# Altium PCB SPWM_PS_V1.00.PCBDOC
Units mm, origin at the board's own origin, x right, y up, seen from the top; angles counter-clockwise.
Board outline 121.4 x 86.4 mm, 2 copper layers (Top Layer, Bottom Layer); 89 components, 57 nets, 294 pads, 45 vias.
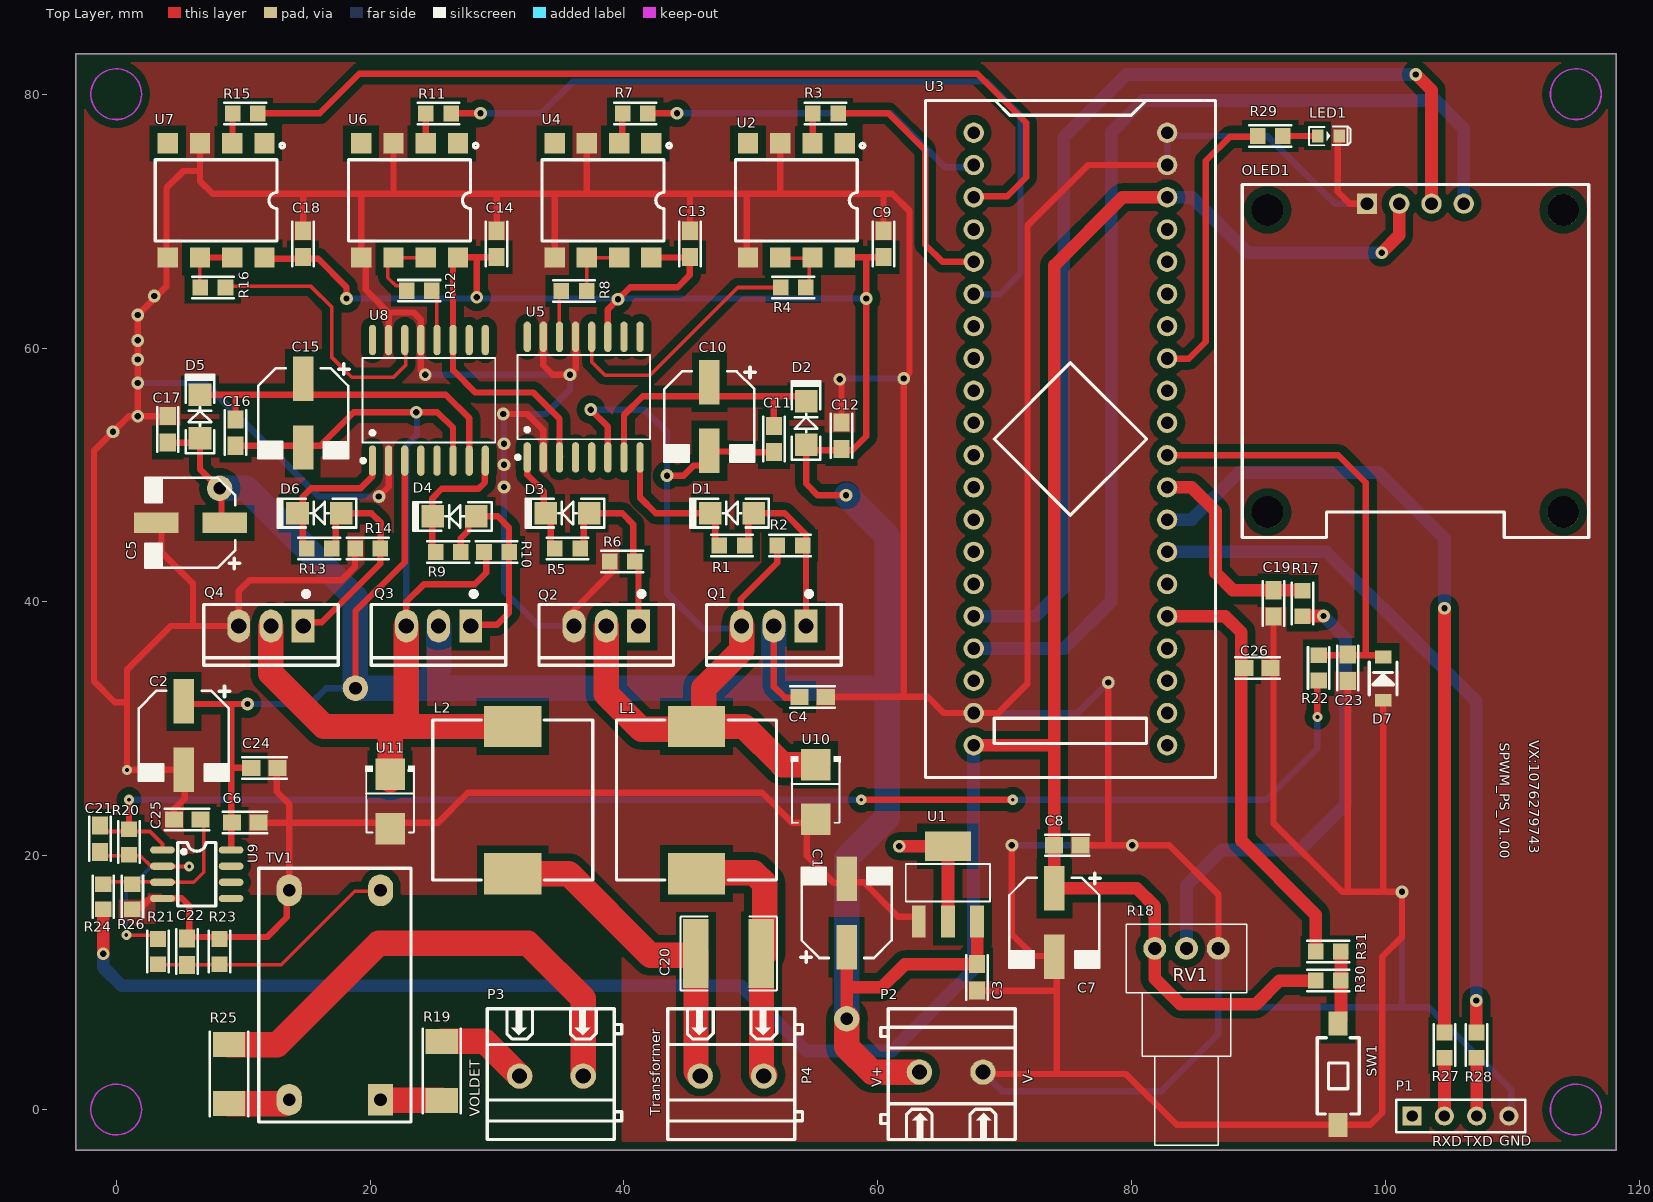
[diagram p0: Top Layer view]
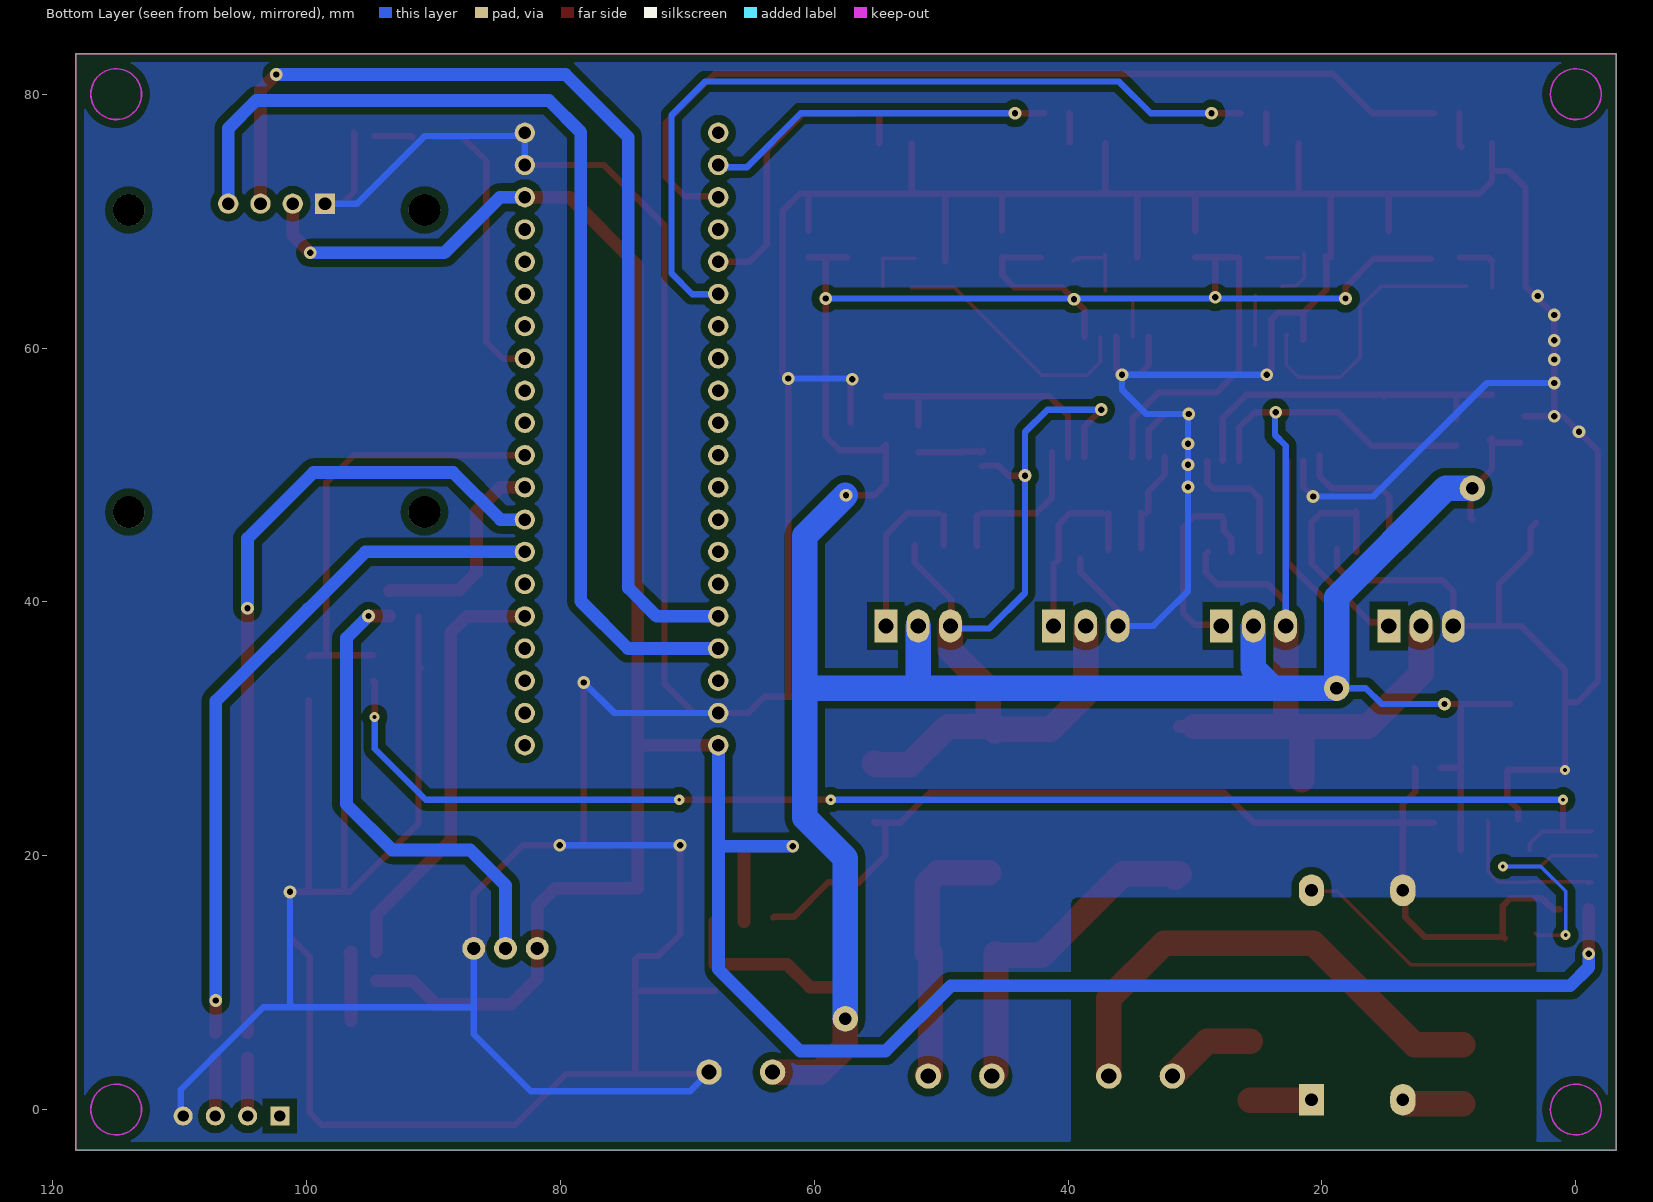
[diagram p1: Bottom Layer view, seen from below]

## Layer stack, top to bottom
Top Layer: signal copper 0.0356
Dielectric: dielectric 0.32, FR-4, Dk 4.8
Bottom Layer: signal copper 0.0356

## Board outline
-3.2,-3.2 -3.2,83.2 118.2,83.2 118.2,-3.2

## Design rules (kind name [scope] priority, off if disabled: settings)
Clearance [All] p1: gap=0.6
ComponentClearance [All] p1: gap=0.254 collisioncheckmode=3 verticalgap=0.254
HoleSize [All] p1: absolutevalues=TRUE maxlimit=3 minlimit=0.025 maxpercent=80.000 minpercent=20.000
PlaneConnect [All] p1: planeconnectstyle=Direct reliefexpansion=0.508 reliefentries=4 reliefconductorwidth=0.254 reliefairgap=0.254
PolygonConnect [All] p1: connectstyle=Direct reliefconductorwidth=0.254 reliefentries=4 polygonreliefangle="90 Angle"
RoutingVias [All] p1: holewidth=0.711 width=1.27 viastyle="Through Hole" minholewidth=0.5 minwidth=1 maxholewidth=0.711 maxwidth=1.27
SolderMaskExpansion [All] p1: expansion=0.102
TestPointUsage [All] p1: valid=0 allowmultiple=FALSE
Testpoint [All] p1: side=3 testpointundercomponent=TRUE minsize=1.016 maxsize=2.54 preferedsize=1.524 minholesize=0 maxholesize=1.016 preferedholesize=0.813 testpointgrid=0.025 style=297 order=0-112345678
Width [All] p1: maxlimit=2 minlimit=0.254 preferedwidth=0.3
16 further rules are at their usual default settings.

## Components (designator, comment, footprint, x,y, rotation, side; value= is the part's Value field where it differs from the comment)
C1 "100uF/35V" PCD-10135-MB-36_100UF/35V 57.55,15.494 r90 top
C2 "100uF/35V" PCD-10135-MB-36_100UF/35V 5.334,29.464 r270 top
C3 "100nF" PC7-*****-KN-0A_0805 67.818,10.414 r270 top
C4 "100nF" PC7-*****-KN-0A_0805 54.864,32.512 r0 top
C5 "100uF/35V" PCD-10135-MB-36_100UF/35V 5.842,46.228 r180 top
C6 "100nF" PC7-*****-KN-0A_0805 10.16,22.606 r0 top
C7 "100uF/35V" PCD-10135-MB-36_100UF/35V 73.914,14.732 r270 top
C8 "100nF" PC7-*****-KN-0A_0805 74.93,20.828 r0 top
C9 "PC7_1206" PC7-*****-KN-0A_0805 60.452,68.198 r90 top
C10 "10uF/35V" PCD-10050-MA-26_10UF/50V 46.736,54.61 r270 top
C11 "100nF" PC7-*****-KN-0A_0805 51.816,52.832 r270 top
C12 "100nF" PC7-*****-KN-0A_0805 57.15,53.086 r90 top
C13 "PC7_1206" PC7-*****-KN-0A_0805 45.212,68.198 r90 top
C14 "100nF" PC7-*****-KN-0A_0805 29.972,68.198 r90 top
C15 "10uF/35V" PCD-10050-MA-26_10UF/50V 14.732,54.864 r270 top
C16 "100nF" PC7-*****-KN-0A_0805 9.398,53.34 r270 top
C17 "100nF" PC7-*****-KN-0A_0805 4.064,53.594 r90 top
C18 "100nF" PC7-*****-KN-0A_0805 14.732,68.198 r90 top
C19 "100nF" PC7-*****-KN-0A_0805 91.186,39.878 r90 top
C20 "47uF" C2220 48.26,12.296 r0 top
C21 "101" PC7-*****-KN-0A_0805 -1.27,21.336 r270 top
C22 "101" PC7-*****-KN-0A_0805 5.588,12.446 r270 top
C23 "102" PC7-*****-KN-0A_0805 97.028,34.798 r270 top
C24 "104" PC7-*****-KN-0A_0805 11.684,26.924 r0 top
C25 "104" PC7-*****-KN-0A_0805 5.588,22.86 r0 top
C26 "100nF" PC7-*****-KN-0A_0805 89.916,34.798 r180 top
D1 "1N4148" PDD-00020-30-2A_RLS4148NTE-11-K 48.514,46.99 r180 top
D2 "1N4007" PDD-00020-30-2A_RLS4148NTE-11-K 54.356,54.102 r90 top
D3 "1N4148" PDD-00020-30-2A_RLS4148NTE-11-K 35.56,46.99 r180 top
D4 "1N4148" PDD-00020-30-2A_RLS4148NTE-11-K 26.67,46.736 r180 top
D5 "1N4007" PDD-00020-30-2A_RLS4148NTE-11-K 6.604,54.61 r90 top
D6 "1N4148" PDD-00020-30-2A_RLS4148NTE-11-K 16.002,46.99 r180 top
D7 "PTVS3V3S1UR" SOD123 99.822,32.258 r90 top
L1 "47uH" IND-SMD_L13.8-W12.6_H6.5 45.72,24.384 r270 top
L2 "47uH" IND-SMD_L13.8-W12.6_H6.5 31.242,24.384 r270 top
LED1 "LED-0603_R" LED0603_RED 95.504,76.708 r0 top
OLED1 "UN-2864KMBEG01" OLED-TH_4P-P2.54-L27.8-W27.3 102.362,71.374 r0 top
P1 "Header 4" HDR1X4 102.108,-0.508 r0 top
P2 "Header 2" CONN-TH_2P-P5.00_WJ128V-5.0-2P 65.786,2.952 r0 top
P3 "Header 2" CONN-TH_2P-P5.00_WJ128V-5.0-2P 34.29,2.641 r180 top
P4 "Header 2" CONN-TH_2P-P5.00_WJ128V-5.0-2P 48.514,2.641 r180 top
Q1 "IRFZ44NPBF" TO-220-3_L10.0-W4.5-P2.54-L 51.816,38.1 r180 top
Q2 "IRFZ44NPBF" TO-220-3_L10.0-W4.5-P2.54-L 38.608,38.1 r180 top
Q3 "IRFZ44NPBF" TO-220-3_L10.0-W4.5-P2.54-L 25.4,38.1 r180 top
Q4 "IRFZ44NPBF" TO-220-3_L10.0-W4.5-P2.54-L 12.192,38.1 r180 top
R1 "51R" PRC-*****-1M-0A_0805 48.514,44.45 r0 top
R2 "103" PRC-*****-1M-0A_0805 53.086,44.45 r0 top
R3 "220R" PRC-*****-1M-0A_0805 55.88,78.486 r180 top
R4 "100R" PRC-*****-1M-0A_0805 53.34,64.77 r180 top
R5 "51R" PRC-*****-1M-0A_0805 35.56,44.196 r0 top
R6 "103" PRC-*****-1M-0A_0805 39.878,43.18 r0 top
R7 "220R" PRC-*****-1M-0A_0805 40.894,78.486 r180 top
R8 "100R" PRC-*****-1M-0A_0805 36.068,64.5 r180 top
R9 "51R" PRC-*****-1M-0A_0805 26.162,43.942 r0 top
R10 "103" PRC-*****-1M-0A_0805 29.972,43.942 r0 top
R11 "220R" PRC-*****-1M-0A_0805 25.4,78.486 r180 top
R12 "100R" PRC-*****-1M-0A_0805 23.876,64.516 r0 top
R13 "51R" PRC-*****-1M-0A_0805 16.002,44.196 r0 top
R14 "103" PRC-*****-1M-0A_0805 19.812,44.196 r0 top
R15 "220R" PRC-*****-1M-0A_0805 10.16,78.486 r180 top
R16 "100R" PRC-*****-1M-0A_0805 7.62,64.77 r0 top
R17 "1K" PRC-*****-1M-0A_0805 93.472,39.878 r270 top
R18 "10K" RES-ADJ-TH_RK09Y11L0001 84.328,12.7 r0 top
R19 "150K/2010" PRC-*****-CM-0A_2010 25.654,3.048 r90 top
R20 "10K" PRM-*****-1N-0A_0805 1.016,21.082 r270 top
R21 "5.1K" PRM-*****-1N-0A_0805 3.302,12.446 r270 top
R22 "100R" PRM-*****-1N-0A_0805 94.742,34.798 r270 top
R23 "200R" PRM-*****-1N-0A_0805 8.128,12.446 r270 top
R24 "10K" PRM-*****-1N-0A_0805 -1.016,16.764 r90 top
R25 "150K/2010" PRC-*****-CM-0A_2010 8.89,2.794 r270 top
R26 "2.0K" PRM-*****-1N-0A_0805 1.27,16.764 r270 top
R27 "1K" PRC-*****-1M-0A_0805 104.648,5.08 r270 top
R28 "1K" PRC-*****-1M-0A_0805 107.188,5.08 r270 top
R29 "1K" PRC-*****-1M-0A_0805 90.932,76.708 r0 top
R30 "1K" PRC-*****-1M-0A_0805 95.504,10.16 r180 top
R31 "1K" PRC-*****-1M-0A_0805 95.504,12.446 r180 top
SW1 "TS-1101-C-W" SW-SMD_L6.0-W3.3-LS8.0 96.266,2.794 r90 top
TV1 "Header 4" TV0815-1 20.828,17.272 r180 top
U1 "#NAME?" SOT-223-3_L6.5-W3.4-P2.30-LS7.0-BR 65.532,17.78 r270 top
U2 "TLP250H(TP1,F)" SMD-8_L9.6-W6.4-P2.54-LS9.6-BL 53.594,71.628 r180 top
U3 "LCKFB-DKX-STM32F103C8T6" CONN-TH_L53.3-W22.9_STM32F103C8T6-CARD 75.184,52.832 r270 top locked
U4 "TLP250H(TP1,F)" SMD-8_L9.6-W6.4-P2.54-LS9.6-BL 38.354,71.628 r180 top
U5 "IR2110STRPBF" SOIC-16_L10.3-W7.5-P1.27-LS10.3-BL 36.83,56.134 r0 top
U6 "TLP250H(TP1,F)" SMD-8_L9.6-W6.4-P2.54-LS9.6-BL 23.114,71.628 r180 top
U7 "TLP250H(TP1,F)" SMD-8_L9.6-W6.4-P2.54-LS9.6-BL 7.874,71.628 r180 top
U8 "IR2110STRPBF" SOIC-16_L10.3-W7.5-P1.27-LS10.3-BL 24.638,55.88 r0 top
U9 "LM258" LM358-SOIC-8 6.35,18.542 r270 top
U10 "SMBJ24A" SMB_L4.3-W3.6-LS5.3-RD 55.118,25.028 r270 top
U11 "SMBJ24A" SMB_L4.3-W3.6-LS5.3-RD 21.59,24.266 r270 top

## Footprints (in the part's own frame and the unit in brackets; to place one, negate y for a bottom-side part, rotate by r counter-clockwise, add the part's x,y. Pads: shape width x height; smd on the part's side, far side on the other; paste and mask are expansions set on the pad)
C2220 [mm]
  rect 2.01x5.4 smd: 1(-2.58,0) 2(2.58,0)
  silkscreen extent -3.81,-2.93 3.81,2.93
CONN-TH_2P-P5.00_WJ128V-5.0-2P [mm]
  round 2 hole 1.2: 1(-2.504,0) 2(2.504,0)
  silkscreen extent -5.55,-5.4 5.05,5
CONN-TH_L53.3-W22.9_STM32F103C8T6-CARD [mm]
  round 1.6 hole 1: 1(-24.13,-7.62) 2(-21.59,-7.62) 3(-19.05,-7.62) 4(-16.51,-7.62) 5(-13.97,-7.62) 6(-11.43,-7.62) 7(-8.89,-7.62) 8(-6.35,-7.62) 9(-3.81,-7.62) 10(-1.27,-7.62) 11(1.27,-7.62) 12(3.81,-7.62) 13(6.35,-7.62) 14(8.89,-7.62) 15(11.43,-7.62) 16(13.97,-7.62) 17(16.51,-7.62) 18(19.05,-7.62) 19(21.59,-7.62) 20(24.13,-7.62) 21(24.13,7.62) 22(21.59,7.62) 23(19.05,7.62) 24(16.51,7.62) 25(13.97,7.62) 26(11.43,7.62) 27(8.89,7.62) 28(6.35,7.62) 29(3.81,7.62) 30(1.27,7.62) 31(-1.27,7.62) 32(-3.81,7.62) 33(-6.35,7.62) 34(-8.89,7.62) 35(-11.43,7.62) 36(-13.97,7.62) 37(-16.51,7.62) 38(-19.05,7.62) 39(-21.59,7.62) 40(-24.13,7.62)
  silkscreen extent -26.67,-11.43 26.67,11.43
HDR1X4 [mm] "Connector; Header; 4 Position"
  rect 1.5x1.5 hole 0.9: 1(0,0)
  round 1.5 hole 0.9: 2(2.54,0) 3(5.08,0) 4(7.62,0)
  silkscreen extent -1.27,-1.27 8.89,1.27
IND-SMD_L13.8-W12.6_H6.5 [mm]
  rect 3.25x4.5 smd: 1(-5.8,0) 2(5.8,0)
  silkscreen extent -6.3,-6.3 6.3,6.3
LED0603_RED [mm]
  rect 0.9x1 smd: 1(-0.85,0) 2(0.85,0)
  silkscreen extent -1.54,-0.73 1.75,0.73
LM358-SOIC-8 [mil]
  oval 22.38x76.78 smd: 1(-75,-106.5) 2(-25,-106.5) 3(25,-106.5) 4(75,-106.5) 5(75,106.5) 6(25,106.5) 7(-25,106.5) 8(-75,106.5)
  silkscreen extent -98,-59 98,59
OLED-TH_4P-P2.54-L27.8-W27.3 [mm]
  rect 1.6x1.6 hole 1: 1(-3.81,0)
  round 1.6 hole 1: 2(-1.27,0) 3(1.27,0) 4(3.81,0)
  round 2.5 hole 2.5 unplated: ""(-11.65,-24.3) ""(-11.65,-0.5) ""(11.65,-24.3) ""(11.65,-0.5)
  silkscreen extent -13.65,-26.3 13.65,1.5
PC7-*****-KN-0A_0805 [mm] "0805"
  rect 1.424x1.27 smd: 1(-1.04,0) 2(1.04,0)
  silkscreen extent -1.75,-0.84 1.75,0.84
PCD-10050-MA-26_10UF/50V [mm] "6.3D"
  rect 3.5x1.6 smd: 1(-2.7,0) 2(2.7,0)
  silkscreen extent -3.89,-3.55 3.55,3.62
PCD-10135-MB-36_100UF/35V [mm] "6.3D"
  rect 3.5x1.6 smd: 1(-2.7,0) 2(2.7,0)
  silkscreen extent -3.89,-3.55 3.55,3.62
PDD-00020-30-2A_RLS4148NTE-11-K [mil]
  rect 70x70 smd: 1(67.5,0) 2(-67.5,0)
  silkscreen extent -115,-44 129,44
PRC-*****-1M-0A_0805 [mm] "0805"
  rect 1.224x1.27 smd: 1(-0.993,0) 2(0.993,0)
  silkscreen extent -1.64,-0.84 1.64,0.84
PRC-*****-CM-0A_2010 [mm] "2010"
  rect 1.959x2.54 smd: 1(-2.326,0) 2(2.326,0)
  silkscreen extent -3.33,-1.5 3.33,1.5
PRM-*****-1N-0A_0805 [mm] "0805"
  rect 1.224x1.27 smd: 1(-0.993,0) 2(0.993,0)
  silkscreen extent -1.64,-0.84 1.64,0.84
RES-ADJ-TH_RK09Y11L0001 [mm]
  round 1.8 hole 1: 1(-2.5,0) 2(0,0) 3(2.5,0)
  silkscreen extent -4.75,-15.5 4.75,1.9
SMB_L4.3-W3.6-LS5.3-RD [mm]
  rect 2.5x2.3 smd: 1(-2.15,0) 2(2.15,0)
  silkscreen extent -2.81,-1.96 2.43,1.95
SMD-8_L9.6-W6.4-P2.54-LS9.6-BL [mm]
  rect 1.6x1.6 smd: 1(-3.81,-4.5) 2(-1.27,-4.5) 3(1.27,-4.5) 4(3.81,-4.5) 5(3.81,4.5) 6(1.27,4.5) 7(-1.27,4.5) 8(-3.81,4.5)
  silkscreen extent -5.39,-4.5 4.8,3.2
SOD123 [mm]
  rect 1x1.3 smd: 1(0,0) 2(3.4,0)
  silkscreen extent 0.4,-1.1 3,1.1
SOIC-16_L10.3-W7.5-P1.27-LS10.3-BL [mm]
  oval 0.574x2.401 smd: 1(-4.445,-4.75) 2(-3.175,-4.75) 3(-1.905,-4.75) 4(-0.635,-4.75) 5(0.635,-4.75) 6(1.905,-4.75) 7(3.175,-4.75) 8(4.445,-4.75) 9(4.445,4.75) 10(3.175,4.75) 11(1.905,4.75) 12(0.635,4.75) 13(-0.635,4.75) 14(-1.905,4.75) 15(-3.175,4.75) 16(-4.445,4.75)
  silkscreen extent -5.33,-4.9 5.23,3.32
SOT-223-3_L6.5-W3.4-P2.30-LS7.0-BR [mm]
  rect 2.5x1.1 smd: 1(2.97,-2.3) 2(2.97,0) 3(2.97,2.3)
  rect 2.34x3.6 smd: 4(-2.97,0)
  silkscreen extent -1.57,-3.33 1.37,3.33
SW-SMD_L6.0-W3.3-LS8.0 [mm]
  rect 1.9x1.5 smd: 1(-4,0) 2(4,0)
  silkscreen extent -3.14,-1.67 2.86,1.63
TO-220-3_L10.0-W4.5-P2.54-L [mm]
  rect 1.8x2.6 hole 1.2: 1(-2.54,0.005)
  oval 1.8x2.6 hole 1.2: 2(0,0.005) 3(2.54,-0.005)
  silkscreen extent -5.3,-2.73 5.3,3.09
TV0815-1 [mm]
  rect 2x2.5 hole 1: 1(0,16.5)
  oval 2x2.5 hole 1: 2(0,0) 3(7.2,0) 4(7.2,16.5)
  silkscreen extent -2.4,-1.75 9.6,18.25

## Part data
C1 C2 C5 C7 C10 C15: library part PCD_100uF/35V, "PCD-10135-MB-36"
C3 C4 C6 C8 C11 C12 C14 C16 C17 C18 C19 C26: library part PC7_1206, "PC7-*****-KM-0A_1206"
C9 C13: "PC7-*****-KM-0A_1206"
C20: library part FS55X226K101LRG
C21 C22 C23 C24 C25: library part "Cap Semi", "Capacitor (Semiconductor SIM Model)"
D1 D2 D3 D4 D5 D6: library part PDD_RLS4148NTE-11-K, "PDD-00020-30-2A"
D7: library part Diode, "Default Diode"
L1 L2: library part YSPI1365-470M
P1 TV1: "Header, 4-Pin"
P2 P3 P4: "Header, 2-Pin"
R1 R2 R3 R4 R5 R6 R7 R8 R9 R10 R11 R12 R13 R14 R15 R16 R17 R27 R28 R29 R30 R31: library part PRC_1206, "PRC-*****-2M-0A_1206"
R18: library part RK09Y11L0001
R19 R25: library part PRC_2010, "PRC-*****-CM-0A_2010"
R20 R21 R22 R23 R24 R26: library part RES-SM
U1: library part AMS1117-3.3_C6186
U9: library part PIC_NJM2904, "PIC-01330-01-20"
U10 U11: library part SMBJ24A_C19077578

## Free pads (board coordinates)
  round 2 hole 1: 0(18.85,33.2) 1(57.55,7.15) 2(8.15,48.95)

## Via types
v1: diameter 1, hole 0.5, Top Layer to Bottom Layer, 38 vias
v2: diameter 0.8, hole 0.3, Top Layer to Bottom Layer, 7 vias

## Nets (pads, with @x,y where several pads share a name; then routed paths per layer and width w, separated by ;. In a path a pad name is that pad's centre, name@x,y a point inside that pad or via, vN(x,y) a via of type N, cw(c..) or ccw(c..) an arc to the next point about the centre after c; other vN are vias at no path point)
+15V: C1.1 C2.1 C3.1 C4.1 C5.1 C6.1 C9.1 C12.1 C13.1 C14.1 C17.1 C18.1 C24.1 D2.2 D5.2 P2.1 pad.0 pad.1 pad.2 Q1.2 Q3.2 U1.3 U2.8 U4.8 U5.3 U5.11 U6.8 U7.8 U8.3 U8.11 U9.8 | length 332.8
  Top Layer w0.28: U6.8@26.543,67.107 U6.8@26.674,67.238 ; U6.8 U6.8@26.954,67.158 ; U4.8 U4.8@42.194,67.158
  Top Layer w0.5: C17.1@4.4,52.55 D5.2@6.6,52.55 ; C2.1@5.15,31.95 5.334,31.95 9,31.95 ; D5.2 6.604,50.446 8.125,48.925 8.3,48.75 8.3,46.65 8.21,46.56 C5.1@8.15,46.5 ; D5.2@6.775,52.725 D5.2@6.8,52.75 ; U9.8 C6.1@9.055,22.541 ; C6.1 C6.1@9.055,22.541 ; v1(10.35,31.95) 9,31.95 ; C24.1 9.129,26.924 9.055,26.85 ; U7.8@11.434,67.033 11.684,67.033 14.732,67.033 15.917,67.033 18.15,64.8 v1(18.15,63.9) ; pad.0 18.85,39.25 22.733,43.133 U8.3 ; U6.8@26.543,67.107 U8.11 26.543,58.257 28.3,56.5 32.85,56.5 34.925,54.425 U5.3 U5.3@35,51.459 ; U6.8@26.954,67.158 28.4,67.158 ; v1(28.4,64) 28.4,67.158 ; C14.1 28.4,67.158 ; U5.11 38.735,63.035 v1(39.532,63.832) 40.5,64.8 44.25,64.8 45.2,65.75 C13.1@45.2,67.146 ; U4.8 45.182,67.128 C13.1@45.2,67.146 ; C13.1 C13.1@45.2,67.146 ; Q1.2@51.816,38.42 Q1.2 51.816,33.334 52.7,32.45 53.762,32.45 C4.1 ; D2.2@54.5,51.8 54.65,51.95 57.15,51.95 57.992,51.95 59.1,53.058 v1(59.1,63.9) 59.1,67.108 59.05,67.158 ; D2.2@54.698,52.046 D2.2 54.356,49.294 55.25,48.4 v1(57.5,48.4) ; U2.8 57.434,67.158 59.05,67.158 ; v1@57.45,48.3 57.525,48.375 v1@57.55,48.4 ; C9.1 59.05,67.158 ; 9,31.95 9.055,31.895 9.055,26.85 ; C6.1@9.055,22.541 9.055,22.606 9.055,26.85
  Top Layer w1: pad.1@57.404,7.004 pad.1 57.55,9.65 ; C1.1@57.55,12.75 57.55,9.65 ; P2.1@63,2.65 P2.1@63.1,2.75 ; C3.1 67.814,11.45 62.15,11.45 60.35,9.65 57.55,9.65 ; C3.1@67.832,11.454 U1.3
  Top Layer w2: pad.1@57.6,7.1 pad.1 ; pad.1@57.604,7.204 pad.1 ; P2.1 59.548,2.952 57.55,4.95 pad.1
  Bottom Layer w0.5: v1(10.35,31.95) 15.3,31.95 16.55,33.2 pad.0 pad.0@18.7,33.35 ; v1(18.15,63.9) 28.4,63.9 39.532,63.9 v1(59.1,63.9)
  Bottom Layer w2: pad.2@8.15,48.9 pad.2 10.25,48.95 18.85,40.35 pad.0 23.85,33.2 ; Q3.2 25.4,34.75 23.85,33.2 ; Q1.2 51.816,33.366 51.65,33.2 ; pad.1 57.55,19.8 60.75,23 60.75,33.4 ; v1@57.55,48.4 60.75,45.2 60.75,33.4 ; 23.85,33.2 51.65,33.2 ; 51.65,33.2 60.55,33.2 60.75,33.4
AD_IN0: C23.1 D7.2 R22.1 U3.30 | length 35.3
  Top Layer w0.5: U3.30 96.288,51.562 98.45,49.4 98.45,35.791 ; R22.1 97.028,35.791 98.45,35.791 ; D7.2 99.689,35.791 98.45,35.791
BEEP: U3.34
EH_1: P3.2 R19.2 | length 7.3
  Top Layer w2: R19.2 29.053,5.374 P3.2
EH_2: P3.1 R25.1 | length 39.1
  Top Layer w2: R25.1 12.7,5.12 20.68,13.1 32.45,13.1 36.8,8.75 36.8,2.647 P3.1
GND: C1.2 C2.2 C3.2 C4.2 C5.2 C6.2 C7.2 C8.2 C9.2 C12.2 C13.2 C14.2 C17.2 C18.2 C19.1 C22.1 C23.2 C24.2 C25.1 C26.1 D7.1 LED1.2 OLED1.1 P1.4 P2.2 Q2.3 Q4.3 R6.1 R14.1 R18.3 R23.1 R26.2 SW1.1 TV1.3 U1.1 U2.3 U2.5 U3.19 U3.39 U3.40 U4.3 U4.5 U5.2 U5.13 U5.15 U6.3 U6.5 U7.3 U7.5 U8.2 U8.13 U8.15 U9.4 U10.2 U11.2 | length 785.4
  Top Layer w0.5: R26.2 1.771,15.771 2.55,16.55 ; 2.112,16.05 2.699,16.637 U9.4 5.155,16.637 5.75,16.042 C22.1@5.75,13.85 ; C5.2 3.571,45.799 3.571,43.9 6.05,41.421 6.05,38.1 ; C17.2 v1(1.7,54.634) ; C25.1 4.548,23.648 5.4,24.5 5.4,26.698 C2.2 0.864,26.764 v2(0.85,26.75) 0.85,31.9 ; C22.1 5.702,13.6 8.128,13.6 11.9,13.6 13.45,15.15 13.45,17.094 TV1.3 13.628,22.606 ; U7.3 6.604,73.95 ; Q4.3@9.652,37.78 Q4.3@9.652,38.1 ; Q4.3@10.002,38.105 9.997,38.1 Q4.3@9.652,38.1 ; C6.2 13.628,22.606 ; C24.2 12.65,26.85 12.65,25.05 13.628,24.072 13.628,22.606 ; C18.2 14.732,72.132 ; R14.1 18.819,42.769 17.75,41.7 10.5,41.7 9.652,40.852 Q4.3 Q4.3@9.652,38.1 ; U6.5 19.304,71.996 19.15,72.15 ; U6.5@19.744,67.238 19.65,67.144 19.65,67.128 19.65,64.6 21.45,62.8 23.45,62.8 24.003,62.247 U8.13 24.003,58.247 v1(24.35,57.9) ; v1(20.7,48.3) 21.463,49.063 U8.2 ; U8.15 21.463,62.787 ; 21.844,72.156 U6.3 ; C14.2 29.972,72.078 29.9,72.15 ; v1(30.5,54.8) 32.4,54.8 33.655,53.545 U5.2 ; U5.15 33.655,58.65 34.405,57.9 v1(35.75,57.9) ; U4.5 34.544,72.144 ; v1@35.6,57.75 v1(35.75,57.9) ; Q2.3@35.718,37.78 35.85,37.912 35.85,38.105 35.85,39.15 39.05,42.35 39.05,43.18 R6.1@39.05,43.4 ; U5.13 36.195,58.345 v1(35.75,57.9) ; U4.3 37.084,72.184 37.05,72.15 ; C13.2 45.212,72.088 45.15,72.15 ; U2.5@49.684,66.818 49.684,67.128 49.684,71.866 ; U2.3 52.324,72.224 52.25,72.15 ; U10.2@55.282,22.676 55.21,22.604 55.118,22.604 U10.2@54.4,22.604 ; C4.2@55.9,32.512 55.9,32.55 C4.2@56.1,32.75 ; C4.2 62.05,32.512 ; v1@57.05,57.6 57.15,57.5 C12.2 ; C1.2@57.55,17.85 56.55,17.85 54.4,20 U10.2@54.4,22.604 ; C1.2@57.55,17.9 58.9,17.9 61.6,15.2 63.162,15.2 U1.1@63.232,15.13 ; C9.2 60.45,69.24 60.45,72.15 ; U3.19@67.672,31.35 U3.19 ; C3.2 74.074,9.374 74.1,9.4 ; P2.2 68.442,2.8 79.55,2.8 83.556,-1.206 SW1.1 98.794,-1.206 99.75,-0.25 99.75,12.05 101.3,13.6 v1(101.3,17.15) 100.05,17.15 ; 70.536,16.764 70.572,16.8 ; v1(70.572,20.828) 70.572,16.8 ; 74.1,3.15 74.1,9.4 ; C8.2 78.15,20.828 ; v1(78.15,33.65) 78.15,20.828 ; U3.39 76.572,74.422 71.8,69.65 71.8,33.55 69.492,31.242 U3.19 ; R18.3@86.828,12.55 86.85,12.572 86.85,12.7 86.85,16.95 82.972,20.828 v1(80.05,20.828) 78.15,20.828 ; C26.1 C26.1@91.186,35.028 ; C19.1 C26.1@91.186,35.028 ; LED1.2@96.25,76.95 96.25,76.708 96.25,72.3 97.176,71.374 OLED1.1 ; C23.2 97.028,17.178 97,17.15 ; D7.1 99.822,17.378 100.05,17.15 ; 0.85,31.9 0.85,34.65 4.3,38.1 6.05,38.1 ; 0.85,31.9 0.65,32.1 -0.1,32.1 -1.75,33.75 -1.75,51.9 v1(-0.25,53.4) 0.984,54.634 v1(1.7,54.634) ; v1(1.7,54.634) v1(1.7,57.25) v1(1.7,59.1) v1(1.7,60.6) v1(1.7,62.6) 3.1,64 3.964,64.864 3.964,67.128 3.964,72.614 5.3,73.95 6.604,73.95 ; 6.05,38.1 Q4.3@9.652,38.1 ; 6.604,73.95 6.604,73.146 7.6,72.15 19.15,72.15 ; 13.628,22.606 21.59,22.606 25.356,22.606 27.7,24.95 50.895,24.95 53.241,22.604 U10.2@54.4,22.604 ; 19.15,72.15 29.9,72.15 ; 29.9,72.15 37.05,72.15 ; 37.05,72.15 45.15,72.15 ; 45.15,72.15 52.25,72.15 ; 52.25,72.15 60.45,72.15 ; 60.45,72.15 61.15,72.15 62.5,70.8 62.5,58.05 v1(62.05,57.6) 62.05,32.512 ; 62.05,32.512 63.938,32.512 65.208,31.242 U3.19 ; 70.572,16.8 70.572,13.812 72.284,12.1 73.846,12.1 C7.2 74.1,11.846 74.1,9.4 ; C26.1@91.186,35.028 91.186,34.798 91.186,22.564 96.6,17.15 97,17.15 ; 97,17.15 100.05,17.15
  Bottom Layer w0.5: v1(1.7,57.25) 7,57.25 15.95,48.3 v1(20.7,48.3) ; v1(24.35,57.9) v1(35.75,57.9) 35.75,56.7 33.85,54.8 v1(30.5,54.8) 30.55,54.75 v1(30.55,52.45) v1(30.55,50.8) v1(30.55,49.05) 30.55,40.85 32.46,38.94 33.295,38.105 Q2.3@35.85,38.105 ; v1@57.05,57.6 v1(62.05,57.6) ; U3.19@67.506,31.3 U3.19 75.742,31.242 v1(78.15,33.65) ; P2.2 69.792,1.45 82.35,1.45 86.828,5.928 86.828,8 ; v1(70.572,20.828) v1(80.05,20.828) ; U3.39@82.95,74.2 82.804,74.346 U3.39 U3.40 83.066,76.7 90.7,76.7 96.026,71.374 OLED1.1 ; R18.3@86.8,12.522 R18.3@86.828,12.55 ; R18.3 R18.3@86.828,12.55 ; 101.25,8.3 101.3,8.35 v1(101.3,17.15) ; P1.4 109.9,-0.336 109.9,1.55 103.4,8.05 86.878,8.05 86.828,8 ; 86.828,8 R18.3@86.828,12.55
  other v1: 57,57.55 3,64.1
KEY1: C26.2 R31.2 U3.25 | length 33.9
  Top Layer w1: U3.25 87.384,38.862 88.646,37.6 88.646,34.798 88.646,21.204 94.511,15.339 R31.2
LED: R29.1 U3.33 | length 22.7
  Top Layer w0.5: U3.33 82.836,59.15 84.5,59.15 85.85,60.5 85.85,74.75 87.75,76.65 R29.1@89.939,76.65
M+: C20.2 L1.2 P4.1 | length 20.6
  Top Layer w2: L1.2@46.25,18.65 50.25,18.65 51.11,17.79 C20.2@51.11,12.296 ; C20.2 50.84,2.82 P4.1 P4.1@51.11,2.733
M-: C20.1 L2.2 P4.2 | length 27.2
  Top Layer w2: L2.2 35.666,18.584 42.1,12.15 C20.1@45.68,12.15 ; L2.2@31.55,18.3 L2.2@31.75,18.5 ; C20.1 C20.1@45.68,12.15 ; P4.2 45.68,2.971 C20.1@45.68,12.15
NetC10_1: C10.1 C11.1 D2.1 U5.7 | length 20.7
  Top Layer w0.5: U5.7 40.005,54.725 41.48,56.2 46.736,56.2 51.65,56.2 ; C11.1 51.816,56.034 51.65,56.2 ; D2.1@54.35,56.2 51.65,56.2
NetC15_1: C15.1 C16.1 D5.1 U8.7 | length 27.5
  Top Layer w0.5: D5.1 9.55,56.325 ; C16.1 9.398,56.172 9.55,56.325 ; C15.1@15.1,56.2 C15.1@14.975,56.325 ; U8.7 27.813,54.487 25.976,56.325 C15.1@14.975,56.325 ; 9.55,56.325 14.732,56.325 C15.1@14.975,56.325
NetC21_1: C21.1 R20.1 R22.2 U9.1 | length 108.9
  Top Layer w0.3: C21.1@-1.3,21.95 -1.254,21.904 1.016,21.904 2.654,21.904 3.645,20.913 U9.1
  Top Layer w0.5: R20.1 v2(1.016,24.416) ; v2(58.7,24.416) v2(70.634,24.416) ; v2(94.641,30.941) 94.641,33.704 R22.2
  Bottom Layer w0.5: v2(1.016,24.416) v2(58.7,24.416) ; v2(70.634,24.416) 90.616,24.416 94.641,28.441 v2(94.641,30.941)
NetC21_2: C21.2 R20.2 R21.1 U9.2 | length 19.4
  Top Layer w0.28: C21.2@-1.6,20 -1.27,20 1.016,20 1.9,20 2.75,19.15 3.645,19.15 v2(5.75,19.15) ; v2(0.8,13.75) 3.05,13.75 R21.1@3.2,13.9
  Bottom Layer w0.28: v2(0.8,13.75) 0.8,17.2 2.75,19.15 v2(5.75,19.15)
NetC22_2: C22.2 R21.2 R23.2 TV1.2 | length 20
  Top Layer w0.3: R21.2 3.349,11.406 C22.2 8.128,11.406 13.006,11.406 18.8,17.2 20.756,17.2 TV1.2
NetC25_2: C25.2 R24.2 R26.1 U9.3 | length 12.9
  Top Layer w0.3: R24.2@-1.3,17.9 -1.25,17.95 -1.016,17.95 R24.2@-0.823,17.95 ; R24.2 R24.2@-0.823,17.95 ; U9.3 6.107,17.907 6.9,18.7 6.9,22.7 C25.2@6.95,22.75 ; U9.3@3.645,17.95 1.27,17.95 R24.2@-0.823,17.95
NetD1_1: D1.1 R1.1 U5.8 | length 12
  Top Layer w0.5: U5.8@41.275,51.796 U5.8 41.275,48.225 42.51,46.99 D1.1 ; D1.1@47.15,46.8 47.2,46.75 47.2,44.45 R1.1@47.2,44.4
NetD1_2: D1.2 Q1.1 R1.2 R2.2 | length 14.4
  Top Layer w0.5: D1.2@49.75,46.8 49.8,46.75 R1.2@49.8,44.45 ; D1.2 52.66,46.99 54.35,45.3 54.35,44.45 54.35,38.101 Q1.1
NetD3_1: D3.1 R5.1 U5.1 | length 7.8
  Top Layer w0.5: U5.1 32.385,50.015 33.7,48.7 33.7,47.135 D3.1 ; R5.1@34.25,44.2 34.25,46.99 D3.1@34.25,47
NetD3_2: D3.2 Q2.1 R5.2 R6.2 | length 14.9
  Top Layer w0.5: R5.2@36.85,44.1 36.85,44.196 36.85,46.99 D3.2@36.85,47 ; D3.2 39.86,46.99 40.75,46.1 40.75,43.301 R6.2 ; Q2.1@41.148,37.77 Q2.1 R6.2@41.148,42.998
NetD4_1: D4.1 R9.1 U8.8 | length 10.6
  Top Layer w0.5: R9.1@24.9,43.95 24.9,46.736 24.9,48.15 25.65,48.9 28.55,48.9 29.05,49.4 29.05,51.097 U8.8
NetD4_2: D4.2 Q3.1 R9.2 R10.2 | length 16.3
  Top Layer w0.5: R9.2 27.155,45.012 27.749,45.606 D4.2@27.749,46.401 ; D4.2@27.877,46.736 D4.2 30.064,46.736 30.95,45.85 R10.2@30.95,43.957 ; Q3.1 28.045,38.2 30,38.2 30.95,39.15 30.95,43.942 R10.2@30.95,43.957 ; R10.2 R10.2@30.95,43.957
NetD6_1: D6.1 R13.1 U8.1 | length 12
  Top Layer w0.5: R13.1@14.7,44.1 14.7,44.196 14.7,46.99 14.7,48.27 15.38,48.95 19.25,48.95 20.193,49.893 U8.1 U8.1@20.193,51.542
NetD6_2: D6.2 Q4.1 R13.2 R14.2 | length 17.9
  Top Layer w0.5: Q4.1@14.732,38.42 14.752,38.4 16.2,38.4 20.805,43.005 R14.2 20.85,44.241 20.85,46.25 20.11,46.99 D6.2 ; R13.2@17.3,43.95 17.3,44.196 17.3,46.99 17.3,47.1 D6.2@17.35,47.15
NetLED1_1: LED1.1 R29.2 | length 3
  Top Layer w0.5: R29.2@91.65,76.6 91.758,76.708 R29.2 LED1.1
NetP1_2: P1.2 R27.2 | length 4.6
  Top Layer w1: P1.2 R27.2
NetP1_3: P1.3 R28.2 | length 4.6
  Top Layer w1: P1.3 R28.2
NetR3_2: R3.2 U2.2 | length 2.4
  Top Layer w0.5: U2.2 54.887,76.151 R3.2
NetR4_1: R4.1 U2.6 U2.7 | length 4.8
  Top Layer w0.28: U2.6@52.084,67.058 52.089,67.063 52.324,67.063 U2.7@54.614,67.063 ; R4.1@54.6,64.85 54.614,64.864 U2.7@54.614,67.063 ; U2.7@54.614,67.068 U2.7@54.614,67.063 ; U2.7@54.619,67.063 U2.7@54.614,67.063
NetR4_2: R4.2 U5.12 | length 20.2
  Top Layer w0.28: U5.12 37.465,58.9 38.515,57.85 42.056,57.85 48.976,64.77 R4.2
NetR7_2: R7.2 U4.2 | length 2.3
  Top Layer w0.5: U4.2@39.874,76.188 39.874,78.459 R7.2
NetR8_1: R8.1 U4.6 U4.7 | length 5.7
  Top Layer w0.28: R8.1 37.061,67.128 37.061,67.311 U4.6@37.15,67.4 ; U4.6 39.329,67.128 39.477,66.981 U4.7@39.629,66.828 ; U4.7@39.104,67.068 U4.7@39.2,66.972
NetR8_2: R8.2 U5.14 | length 2.8
  Top Layer w0.28: U5.14 34.925,63.725
NetR11_2: R11.2 U6.2 | length 2.4
  Top Layer w0.5: U6.2 24.384,78.463 R11.2
NetR12_1: R12.1 U6.6 U6.7 | length 6.5
  Top Layer w0.28: U6.6@21.4,67.5 21.4,67.128 21.4,65.55 22.05,64.9 22.883,64.9 23.1,64.9 R12.1@23.15,64.85 ; U6.6 U6.7
NetR12_2: R12.2 U8.12 | length 3.9
  Top Layer w0.28: U8.12@25.273,60.218 U8.12 R12.2@25.273,64.158
NetR15_2: R15.2 U7.2 | length 2.7
  Top Layer w0.5: U7.2@9,75.85 9.167,76.017 9.167,76.128 R15.2
NetR16_1: R16.1 U7.6 U7.7 | length 5
  Top Layer w0.28: R16.1@6.6,64.75 6.6,64.77 6.6,67 U7.6@6.65,67.05
  Top Layer w0.5: U7.6@6.609,66.828 6.756,66.975 6.909,67.128 U7.7
NetR16_2: R16.2 U8.14 | length 22.5
  Top Layer w0.28: R16.2@8.6,64.85 8.613,64.85 15.35,64.85 17,63.2 17,59.25 18.55,57.7 21.85,57.7 22.8,58.65 22.8,60.63 22.8,61.1 U8.14@22.7,61
NetR17_2: R17.2 R18.2 | length 37.3
  Top Layer w1: R17.2 v1(95.115,38.885)
  Bottom Layer w1: R18.2 84.328,17.678 87.1,20.45 93.25,20.45 96.85,24.05 96.85,37.15 v1(95.115,38.885)
NetR19_1: R19.1 TV1.1 | length 4.8
  Top Layer w2: TV1.1 20.878,0.722 R19.1
NetR25_2: R25.2 TV1.4 | length 4.9
  Top Layer w2: R25.2 13.324,0.468 TV1.4
NetR30_1: R30.1 R31.1 SW1.2 | length 5.6
  Top Layer w1: SW1.2@96.497,7.025 R30.1 R31.1 R31.1@96.6,12.343
OUTH: C10.2 C11.2 L1.1 Q1.3 Q2.2 R2.1 U5.6 U10.1 | length 81.3
  Top Layer w0.5: v1(37.4,55.15) 38.735,53.815 U5.6 ; v1(43.4,49.95) 44.7,49.95 45.5,50.75 46.686,50.75 46.736,50.7 C10.2@46.8,50.7 ; C10.2@46.736,51.85 C10.2@46.796,51.85 ; C10.2 C10.2@46.796,51.85 ; C10.2@46.854,51.792 C10.2@46.796,51.85 ; 48.366,51.792 C11.2 ; 48.366,51.85 C10.2@46.796,51.85 ; Q1.3@49.276,37.78 49.2,37.856 49.2,38.105 49.2,40.2 52.093,43.093 R2.1
  Top Layer w1: Q2.2@38.5,37.962 38.608,38.07 38.621,38.083 Q2.2@38.958,38.42
  Top Layer w2: Q2.2 38.608,38.07 38.608,32.742 41.4,29.95 45.6,29.95 L1.1@45.75,29.8 ; L1.1 49.486,30.184 52.492,27.178 U10.1 ; L1.1@46.3,30.684 46.3,33.2 49.276,36.176 Q1.3 ; U10.1@55.244,27.304 U10.1@55.263,27.285
  Bottom Layer w0.5: v1(37.4,55.15) 41.629,55.15 43.4,53.379 v1(43.4,49.95) 43.4,40.7 46.2,37.9 49.156,37.9 Q1.3@49.2,37.856
OUTL: C15.2 C16.2 L2.1 Q3.3 Q4.2 R10.1 U8.6 U11.1 | length 86.1
  Top Layer w0.5: C16.2 14.732,52.3 16.07,52.3 18.72,54.95 v1(23.65,54.95) 25.3,54.95 26.543,53.707 U8.6 ; Q3.3 22.86,40.01 24.25,41.4 28.25,41.4 29.15,42.3 29.15,43.771 R10.1
  Top Layer w1: 22.7,30.184 22.86,30.344 ; L2.1@30.1,30.184 L2.1
  Top Layer w2: Q4.2@12.192,38.07 12.192,34.358 16.366,30.184 21.5,30.184 ; U11.1@21.599,25.98 21.599,26.416 21.599,30.084 21.5,30.184 ; 22.86,30.344 Q3.3 ; L2.1@30.1,30.184 22.7,30.184 21.5,30.184
  Bottom Layer w0.5: Q3.3 22.86,52.31 23.7,53.15 23.7,54.9 v1(23.65,54.95)
PA1: C19.2 R17.1 U3.29 | length 16.9
  Top Layer w1: U3.29 84.742,49.022 86.614,47.15 86.614,42.3 87.996,40.918 C19.2 93.425,40.918 R17.1
PB10: U3.35
PB11: U3.36
PWMA: R3.1 U3.5 | length 19.9
  Top Layer w0.5: R3.1 56.887,78.5 60.85,78.5 63.754,75.596 63.754,68.15 65.102,66.802 U3.5
PWMAN: R7.1 U3.2 | length 27.5
  Top Layer w0.5: R7.1 v1(44.186,78.486)
  Bottom Layer w0.5: v1(44.186,78.486) 61.064,78.486 65.3,74.25 67.392,74.25 U3.2
PWMB: R11.1 U3.6 | length 63.8
  Top Layer w0.5: R11.1 v1(28.7,78.486)
  Bottom Layer w0.5: v1(28.7,78.486) 33.486,78.486 36,81 68.582,81 71.25,78.332 71.25,65.9 69.6,64.25 67.576,64.25 U3.6
PWMBN: R15.1 U3.3 | length 72.4
  Top Layer w0.5: R15.1 16.036,78.486 19.15,81.6 67.85,81.6 71.7,77.75 71.7,73.45 70.2,71.95 68,71.95 U3.3@67.75,71.7
RXD: R27.1 U3.28 | length 64.5
  Top Layer w1: R27.1 v1(104.648,39.502)
  Bottom Layer w1: U3.28 84.732,46.482 88.45,50.2 99.45,50.2 104.648,45.002 v1(104.648,39.502)
SCL: OLED1.3 U3.16 | length 84
  Top Layer w1: v1(102.4,81.55) 103.632,80.318 OLED1.3
  Bottom Layer w1: U3.16 72.412,38.862 74.65,41.1 74.65,76.6 79.6,81.55 v1(102.4,81.55)
SDA: OLED1.4 U3.17 | length 85
  Bottom Layer w1: U3.17 74.672,36.322 78.4,40.05 78.4,77 80.902,79.502 103.97,79.502 106.172,77.3 OLED1.4
TXD: R28.1 U3.27 | length 59.7
  Top Layer w1: v1(107.15,8.6) 107.15,6.111 R28.1
  Bottom Layer w1: U3.27 95.358,43.942 102.925,36.375 ; 99.9,39.45 107.15,32.2 v1(107.15,8.6)
VCC: C7.1 C8.1 OLED1.2 R18.1 R24.1 R30.2 U1.2 U1.4 U3.20 U3.38 | length 230.8
  Top Layer w1: v1(-1.016,12.284) R24.1 ; v1(61.7,20.75) U1.4 U1.2 ; U3.20@67.694,28.832 U3.20 73.712,28.702 73.914,28.5 ; R18.1@81.828,12.55 R18.1 ; R18.1@82.1,12.578 81.903,12.775 R18.1@81.828,12.85 ; U3.38 79.282,71.882 73.914,66.514 73.914,28.5 ; R30.2 91.65,10.16 89.79,8.3 83.85,8.3 81.828,10.322 R18.1 ; v1(99.7,67.5) 101.092,68.892 OLED1.2 ; 73.914,28.5 73.914,20.828 C7.1 80.418,17.432 81.828,16.022 R18.1@81.828,12.85 ; R18.1 R18.1@81.828,12.85
  Bottom Layer w1: v1(-1.016,12.284) -1.016,11.216 0.45,9.75 49.25,9.75 54.387,4.613 61.113,4.613 67.55,11.05 67.55,20.7 ; v1(61.7,20.75) 67.5,20.75 67.55,20.7 ; U3.20 67.55,28.688 67.55,20.7 ; U3.38@82.822,71.9 U3.38 84.768,71.882 89.15,67.5 v1(99.7,67.5)
pads on no net: OLED1. P1.1 U2.1 U2.4 U3.1 U3.4 U3.7 U3.8 U3.9 U3.10 U3.11 U3.12 U3.13 U3.14 U3.15 U3.18 U3.21 U3.22 U3.23 U3.24 U3.26 U3.31 U3.32 U3.37 U4.1 U4.4 U5.4 U5.5 U5.9 U5.10 U5.16 U6.1 U6.4 U7.1 U7.4 U8.4 U8.5 U8.9 U8.10 U8.16 U9.5 U9.6 U9.7

## Polygon pours and split planes (outlines as drawn)
GND on Top Layer "Bottom Layer-No Net" (solid, remove dead copper): -2.917,83.302 118.483,83.302 118.483,-3.098 -2.617,-3.098 -2.917,-2.798
GND on Bottom Layer "Bottom Layer-No Net" (solid, remove dead copper): -3.2,83.2 118.2,83.2 118.2,-3.2 -3.2,-3.2

## Keep-outs
Keep-Out Layer:
  circle w0.127: c0,0 r2
  circle w0.127: c0,80 r2
  circle w0.127: c115,80 r2
  circle w0.127: c115,0 r2
  lines w0.127: -3.2,-3.2 -3.2,83.2 118.2,83.2 118.2,-3.2 -3.2,-3.2

## Silkscreen, mask and mechanical layers (free items; w line width, h text height)
Top Overlay:
  text "VX:1076279743" at 111.35,29.1 h0.8 r270
  text "SPWM_PS_V1.00" at 109,28.9 h0.8 r270
  text "V-" at 72.2,2.05 h0.8 r90
  text "V+" at 60.3,1.75 h0.8 r90
  text "Transformer" at 42.85,-0.5 h0.8 r90
  text "VOLDET" at 28.65,-0.55 h0.8 r90
  text "GND" at 108.95,-2.85 h0.8
  text "RXD" at 103.7,-2.9 h0.8
  text "TXD" at 106.2,-2.9 h0.8

## Text inside footprints (layer, text, board x,y; h text height)
R18: Top Overlay "RV1" at 83.228,10.1 h1